# Altium PCB Copy of sFMC-98_s11.PcbDoc
Units mil, origin at the board's own origin, x right, y up, seen from the top; angles counter-clockwise.
Board outline 3131.92 x 2131.9 mil, 2 copper layers (Top Layer, Bottom Layer); 76 components, 110 nets, 418 pads, 16 vias.
Unrouted connection lines stored in the file: 247.
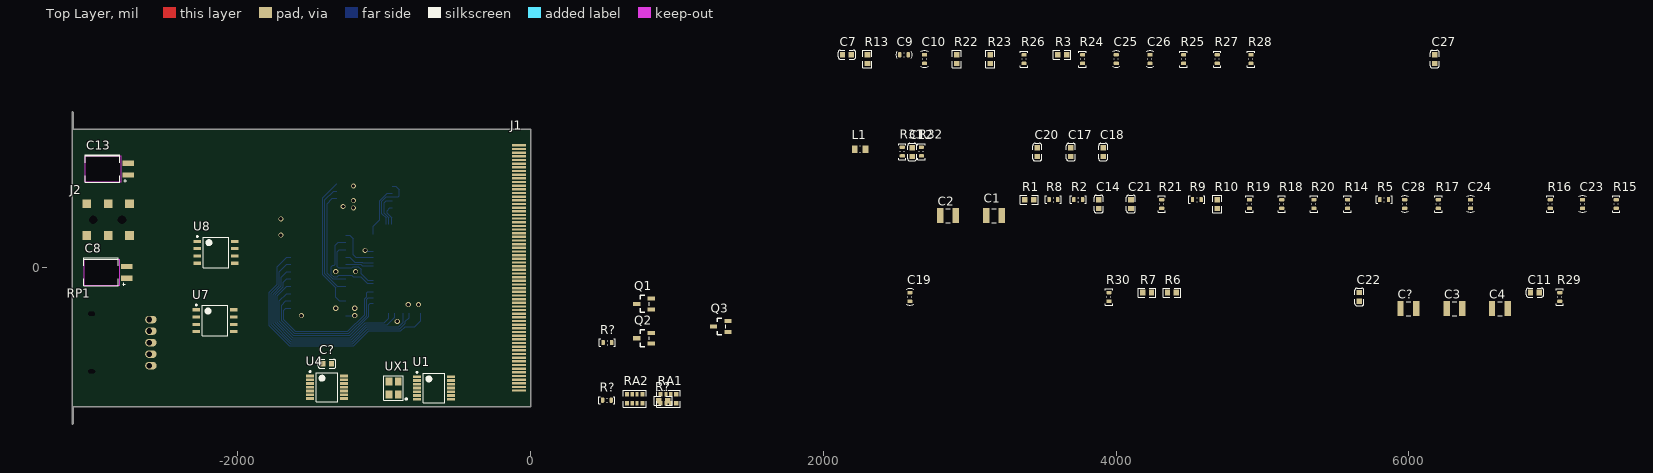
[diagram p0: Top Layer view]
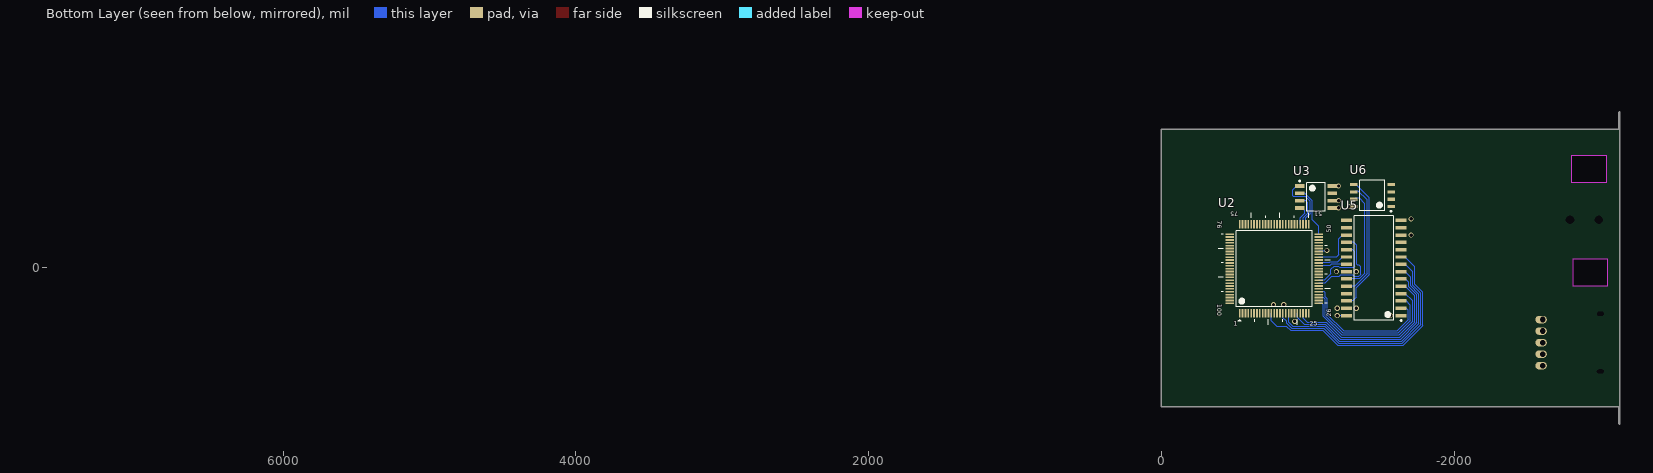
[diagram p1: Bottom Layer view, seen from below]

## Layer stack, top to bottom
Top Solder: solder mask 0.4, Solder Resist, Dk 3.5
Top Layer: signal copper 1.4
Dielectric 1: dielectric 12.6, FR-4, Dk 4.8
Bottom Layer: signal copper 1.4
Bottom Solder: solder mask 0.4, Solder Resist, Dk 3.5

## Board outline
-3131.2,-1062.99 -3131.2,1062.99 cw(c-3128.23,1062.99) -3125.26,1062.99 -3125.26,947.85 -2.24,947.85 cw(c-2.24,944.88) 0.72,944.88 0.72,-944.88 cw(c-2.24,-944.88) -2.24,-947.85 -3125.26,-947.85 -3125.26,-1062.99 cw(c-3128.23,-1062.99)
cut-out: -3040,765 -2800,765 -2800,585 -3040,585
cut-out: -3050,60 -2810,60 -2810,-120 -3050,-120

## Design rules (kind name [scope] priority, off if disabled: settings)
Clearance [All] p1: gap=6 ignorepadtopadclearanceinfootprint=FALSE except(0: Arc-Hole Track-Hole SMDPad-Hole THPad-Hole Via-Hole Fill-Hole Poly-Hole Region-Hole Text-Hole)
PolygonConnect [All] p1: connectstyle=Relief reliefconductorwidth=10 reliefentries=4 polygonreliefangle="90 Angle" airgapwidth=10
RoutingVias [All] p1: holewidth=28 width=50 viastyle="Through Hole" minholewidth=28 minwidth=50 maxholewidth=28 maxwidth=50
SolderMaskExpansion [All] p1: expansion=4
Width [All] p1: maxlimit=50 minlimit=4 preferedwidth=10 minimp=50.000000 maximp=50.000000 favimp=50.000000
30 further rules are at their usual default settings.

## Components (designator, comment, footprint, x,y, rotation, side; value= is the part's Value field where it differs from the comment)
C1 "Cap Pol3" C1210 3166.77,357.01 r0 top value=22uF
C2 "Cap Pol3" C1210 2851.77,357.01 r0 top value=22uF
C3 "Cap Pol3" C1210 6311.77,-277.99 r0 top value=22uF
C4 "Cap Pol3" C1210 6621.77,-277.99 r0 top value=22uF
C7 "100nF (104) 10% 50V" 0603_C 2161.77,1457.01 r0 top
C8 "Cap Elec" C-RB-4_5MM_Cutout -2827.13,-30 r180 top value=10uF
C9 "Cap" CEIA0603X04N 2551.77,1457.01 r0 top value=100nF
C10 "Cap" CEIA0603X04N 2691.77,1427.01 r90 top value=100nF
C11 "470nF (474) 10% 25V" 0603_C 6861.77,-167.99 r0 top
C12 "470nF (474) 10% 25V" 0603_C 2606.77,792.01 r90 top
C13 "Cap Elec" C-RB-4_5MM_Cutout -2817.13,675 r180 top value=10uF
C14 "100nF (104) 10% 50V" 0603_C 3881.77,437.01 r90 top
C17 "100nF (104) 10% 50V" 0603_C 3691.77,792.01 r90 top
C18 "100nF (104) 10% 50V" 0603_C 3911.77,792.01 r90 top
C19 "Cap" CEIA0603X04N 2591.77,-197.99 r90 top value=?F
C20 "100nF (104) 10% 50V" 0603_C 3461.77,792.01 r90 top
C21 "100nF (104) 10% 50V" 0603_C 4101.77,437.01 r90 top
C22 "100nF (104) 10% 50V" 0603_C 5661.77,-197.99 r90 top
C23 "Cap" CEIA0603X04N 7186.77,437.01 r90 top value=?F
C24 "Cap" CEIA0603X04N 6421.77,437.01 r90 top value=?F
C25 "Cap" CEIA0603X04N 4001.77,1427.01 r90 top value=100nF
C26 "Cap" CEIA0603X04N 4231.77,1427.01 r90 top value=100nF
C27 "100nF (104) 10% 50V" 0603_C 6176.77,1427.01 r90 top
C28 "Cap" CEIA0603X04N 5971.77,437.01 r90 top value=?F
C? "100nF (104) 10% 50V" 0603_C -1390,-655 r0 top
C? "Cap Pol3" C1210 5996.77,-277.99 r0 top value=22uF
J1 "PCMCIA Connector" PCF-SMT-K1 0,0 r270 top
J2 "PJ-242" PJ-242 -3097.36,330 r0 top
L1 "Bead" L2012X10N_LQW21 2251.77,812.01 r0 top value=1
Q1 "C945" SOT-23(SOT-23-3) 775,-245 r0 top
Q2 "C945" SOT-23(SOT-23-3) 775,-480 r0 top
Q3 "C945" SOT-23(SOT-23-3) 1300,-400 r0 top
R1 "10KΩ (1002) ±1%" 0603_R 3406.77,467.01 r0 top
R2 "Res1" REIA0603X04N 3741.77,467.01 r0 top value=472
R3 "10KΩ (1002) ±1%" 0603_R 3631.77,1457.01 r0 top
R5 "Res1" REIA0603X04N 5831.77,467.01 r0 top value=1K
R6 "10KΩ (1002) ±1%" 0603_R 4381.77,-167.99 r0 top
R7 "10KΩ (1002) ±1%" 0603_R 4211.77,-167.99 r0 top
R8 "Res1" REIA0603X04N 3571.77,467.01 r0 top value=473
R9 "Res1" REIA0603X04N 4551.77,467.01 r0 top value=472
R10 "10KΩ (1002) ±1%" 0603_R 4691.77,437.01 r90 top
R13 "10KΩ (1002) ±1%" 0603_R 2301.77,1427.01 r90 top
R14 "Res1" REIA0603X04N 5581.77,437.01 r90 top value=473
R15 "Res1" REIA0603X04N 7416.77,437.01 r90 top value=223
R16 "Res1" REIA0603X04N 6966.77,437.01 r90 top value=1K
R17 "Res1" REIA0603X04N 6201.77,437.01 r90 top value=1K
R18 "Res1" REIA0603X04N 5131.77,437.01 r90 top value=680
R19 "Res1" REIA0603X04N 4911.77,437.01 r90 top value=680
R20 "Res1" REIA0603X04N 5351.77,437.01 r90 top value=823
R21 "Res1" REIA0603X04N 4311.77,437.01 r90 top value=473
R22 "10KΩ (1002) ±1%" 0603_R 2911.77,1427.01 r90 top
R23 "10KΩ (1002) ±1%" 0603_R 3141.77,1427.01 r90 top
R24 "Res1" REIA0603X04N 3771.77,1427.01 r90 top value=223
R25 "Res1" REIA0603X04N 4461.77,1427.01 r90 top value=223
R26 "Res1" REIA0603X04N 3371.77,1427.01 r90 top value=473
R27 "Res1" REIA0603X04N 4691.77,1427.01 r90 top value=680
R28 "Res1" REIA0603X04N 4921.77,1427.01 r90 top value=680
R29 "Res1" REIA0603X04N 7031.77,-197.99 r90 top value=10K
R30 "Res1" REIA0603X04N 3951.77,-197.99 r90 top value=10K
R31 "Res1" REIA0603X04N 2540,795 r90 top value=10K
R32 "Res1" REIA0603X04N 2670,795 r270 top value=10K
R? "10KΩ (1002) ±1%" 0603_R 906.77,-907.99 r0 top
R? "Res1" REIA0603X04N 521.77,-902.99 r0 top value=1K
R? "Res1" REIA0603X04N 525,-510 r0 top value=Opt
RA1 "10KΩ (103) ±5%" 0603_Rx4 941.77,-892.99 r0 top
RA2 "10KΩ (103) ±5%" 0603_Rx4 711.77,-892.99 r0 top
RP1 "RPot Generic B103" RPot_RK10J12E_ALPS -2900,-510 r90 top
U1 "7474" TSSOP14_TSOP65P640X120-14N -660,-820 r0 top
U2 "Z86017/Z16017" VQFP100_TSQFP50P1600X1600X160-100N -770,-5 r90 bottom
U3 "ST93C56_C57" "SOIC-8 NB" -1055,485 r180 bottom
U4 "7404" TSSOP14_TSOP65P640X120-14N -1390,-815 r0 top
U5 "YMF288-M SOP28" SOP127P1030X265-28N -1450,0 r0 bottom
U6 "uPD6379A_AL" DMP8_SOIC127P680X175-8N -1440,495 r0 bottom
U7 "NJM3414AD/AM/AV" DMP8_SOIC127P680X175-8N -2155,-360 r0 top
U8 "NJM3414AD/AM/AV" DMP8_SOIC127P680X175-8N -2148.23,107.01 r0 top
UX1 "Crystal OSC" SMD-3225_4P -935,-820 r90 top

## Footprints (in the part's own frame and the unit in brackets; to place one, negate y for a bottom-side part, rotate by r counter-clockwise, add the part's x,y. Pads: shape width x height; smd on the part's side, far side on the other; paste and mask are expansions set on the pad)
0603_C [mm]
  rect 0.93x0.98 smd: 1(-0.77,0) 2(0.77,0)
  silkscreen extent -1.53,-0.79 1.54,0.79, body extent -0.8,-0.4 0.8,0.4, height 0.3
0603_R [mm]
  rect 0.93x0.98 smd: 1(-0.77,0) 2(0.77,0)
  silkscreen extent -1.53,-0.79 1.54,0.79, body extent -0.85,-0.4 0.85,0.4, height 0.56
0603_Rx4 [mm]
  rect 0.75x0.8 smd mask+0.051: 1(-1.35,-0.77) 4(1.35,-0.77) 5(1.35,0.77) 8(-1.35,0.77)
  rect 0.58x0.8 smd mask+0.051: 2(-0.4,-0.77) 3(0.4,-0.77) 6(0.4,0.77) 7(-0.4,0.77)
  silkscreen extent -2.02,-1.47 2.02,1.47, body extent -1.6,-0.8 1.6,0.8, height 0.55
C1210 [mm] "Chip Capacitor, Body 3.2x2.5mm, IPC High Density"
  rect 1.1x2.6 smd: 1(-1.35,0) 2(1.35,0)
  silkscreen extent -0.4,-1.2 0.4,1.2, body extent -1.7,-1.35 1.7,1.35, height 1.3
C-RB-4_5MM_Cutout [mil]
  rect 78.74x35.04 smd: 1(-70,40) 2(-70,-40)
  silkscreen extent -60,-100 225,90, body extent -79,-79 197,79, height 79
CEIA0603X04N [mm] "Chip Capacitor, 2-Leads, Body 1.55x0.85mm, Resistorguide Medium Density"
  rrect50% 0.6x0.9 smd: 1(-0.75,0) 2(0.75,0)
  silkscreen extent -1.4,-0.63 1.4,0.63, body extent -0.8,-0.45 0.8,0.45, height 0.45
DMP8_SOIC127P680X175-8N [mm] "SOIC, 8-Leads, Body 5.00x5.00mm, Pitch 1.27mm, IPC Medium Density"
  rect 1.3x0.55 smd: 1(-3.25,1.905) 2(-3.25,0.635) 3(-3.25,-0.635) 4(-3.25,-1.905) 5(3.25,-1.905) 6(3.25,-0.635) 7(3.25,0.635) 8(3.25,1.905)
  silkscreen extent -3.37,-2.65 2.2,2.85, body extent -3.4,-2.65 3.4,2.65, height 1.75
L2012X10N_LQW21 [mm] "Chip Inductor, 2-Leads, Body 2.00x1.20mm, IPC Medium Density, Murata LQW21 Series"
  rect 0.98x1.34 smd: 1(-0.94,0) 2(0.94,0)
  silkscreen extent -0.05,-0.57 0.05,0.57, body extent -1.05,-0.65 1.05,0.65, height 1
PCF-SMT-K1 [mm] "PCMCIA Female Single Side SMT"
  rect 0.4x2.5 smd: 1(-21.27,-2) 2(-20,-2) 3(-18.73,-2) 4(-17.46,-2) 5(-16.19,-2) 6(-14.92,-2) 7(-13.65,-2) 8(-12.38,-2) 9(-11.11,-2) 10(-9.84,-2) 11(-8.57,-2) 12(-7.3,-2) 13(-6.03,-2) 14(-4.76,-2) 15(-3.49,-2) 16(-2.22,-2) 17(-0.95,-2) 18(0.32,-2) 19(1.59,-2) 20(2.86,-2) 21(4.13,-2) 22(5.4,-2) 23(6.67,-2) 24(7.94,-2) 25(9.21,-2) 26(10.48,-2) 27(11.75,-2) 28(13.02,-2) 29(14.29,-2) 30(15.56,-2) 31(16.83,-2) 32(18.1,-2) 33(19.37,-2) 34(20.64,-2) 35(-20.635,-2) 36(-19.365,-2) 37(-18.095,-2) 38(-16.825,-2) 39(-15.555,-2) 40(-14.285,-2) 41(-13.015,-2) 42(-11.745,-2) 43(-10.475,-2) 44(-9.205,-2) 45(-7.935,-2) 46(-6.665,-2) 47(-5.395,-2) 48(-4.125,-2) 49(-2.855,-2) 50(-1.585,-2) 51(-0.315,-2) 52(0.955,-2) 53(2.225,-2) 54(3.495,-2) 55(4.765,-2) 56(6.035,-2) 57(7.305,-2) 58(8.575,-2) 59(9.845,-2) 60(11.115,-2) 61(12.385,-2) 62(13.655,-2) 63(14.925,-2) 64(16.195,-2) 65(17.465,-2) 66(18.735,-2) 67(20.005,-2) 68(21.27,-2)
  body extent -23.2,0 23.2,6, height 1.75
PJ-242 [mm]
  round 0 hole 1.5: 0(2.8,0) 0(7.8,0)
  rect 1.5x1.5 smd: 2(1.7,2.75) 3(5.4,2.75) 4(9.1,2.75) 5(1.7,-2.75) 6(5.4,-2.75) 7(9.1,-2.75)
  body extent -1.5,-2.5 10.5,2.5, height 3.6
REIA0603X04N [mm] "Chip Resistor, 2-Leads, Body 1.55x0.85mm, Resistorguide Medium Density"
  rrect50% 0.6x0.9 smd: 1(-0.75,0) 2(0.75,0)
  silkscreen extent -1.4,-0.64 1.4,0.64, body extent -0.8,-0.45 0.8,0.45, height 0.45
RPot_RK10J12E_ALPS [mm] "Thru Hole Rotary Potentiometer"
  round 0 hole 0.7 slot 1.2 at 90 deg: 0(-5,2.5) 0(5,2.5)
  oval 1.3x2 hole 1 copper offset 0,-0.3: 1(-4,-7.5) 2(-2,-7.5) 3(0,-7.5) 4(2,-7.5) 5(4,-7.5)
SMD-3225_4P [mm]
  rect 1.4x1.15 smd: 1(-1.1,-0.8) 2(1.1,-0.8) 3(1.1,0.8) 4(-1.1,0.8)
  silkscreen extent -2.1,-2.35 2.1,1.7, body extent -1.6,-1.25 1.6,1.25, height 0.61
"SOIC-8 NB" [mm] "SOIC, 8-Leads, Body 4.90x3.90mm, Pitch 1.27mm, IPC Low Density"
  rect 1.65x0.65 smd: 1(-2.825,1.905) 2(-2.825,0.635) 3(-2.825,-0.635) 4(-2.825,-1.905) 5(2.825,-1.905) 6(2.825,-0.635) 7(2.825,0.635) 8(2.825,1.905)
  silkscreen extent -2.95,-2.5 1.6,2.9, body extent -3,-2.5 3,2.5, height 1.75
SOP127P1030X265-28N [mm] "SOP, 28-Leads, Body 17.90x7.50mm, Pitch 1.27mm, IPC Medium Density"
  rect 1.9x0.6 smd: 1(-4.75,8.255) 2(-4.75,6.985) 3(-4.75,5.715) 4(-4.75,4.445) 5(-4.75,3.175) 6(-4.75,1.905) 7(-4.75,0.635) 8(-4.75,-0.635) 9(-4.75,-1.905) 10(-4.75,-3.175) 11(-4.75,-4.445) 12(-4.75,-5.715) 13(-4.75,-6.985) 14(-4.75,-8.255) 15(4.75,-8.255) 16(4.75,-6.985) 17(4.75,-5.715) 18(4.75,-4.445) 19(4.75,-3.175) 20(4.75,-1.905) 21(4.75,-0.635) 22(4.75,0.635) 23(4.75,1.905) 24(4.75,3.175) 25(4.75,4.445) 26(4.75,5.715) 27(4.75,6.985) 28(4.75,8.255)
  silkscreen extent -4.87,-9.05 3.4,9.23, body extent -5.16,-9.05 5.16,9.05, height 2.65
SOT-23(SOT-23-3) [mm]
  rect 1.25x0.7 smd: 1(1.25,-0.95) 2(1.25,0.95) 3(-1.25,0)
  silkscreen extent -0.65,-1.46 0.9,1.46, body extent -1.5,-1.5 1.5,1.5, height 1.3
TSSOP14_TSOP65P640X120-14N [mm] "TSOP, 14-Leads, Body 5.00x4.40mm, Pitch 0.65mm, IPC Medium Density"
  rect 1.4x0.45 smd: 1(-2.95,1.95) 2(-2.95,1.3) 3(-2.95,0.65) 4(-2.95,0) 5(-2.95,-0.65) 6(-2.95,-1.3) 7(-2.95,-1.95) 8(2.95,-1.95) 9(2.95,-1.3) 10(2.95,-0.65) 11(2.95,0) 12(2.95,0.65) 13(2.95,1.3) 14(2.95,1.95)
  silkscreen extent -3.07,-2.55 1.85,2.85, body extent -3.2,-2.55 3.2,2.55, height 1.2
VQFP100_TSQFP50P1600X1600X160-100N [mm] "TSQFP, 100-Leads, Body 14.00x14.00mm, Pitch 0.50mm, IPC Medium Density"
  rect 1.45x0.3 smd: 1(-7.725,6) 2(-7.725,5.5) 3(-7.725,5) 4(-7.725,4.5) 5(-7.725,4) 6(-7.725,3.5) 7(-7.725,3) 8(-7.725,2.5) 9(-7.725,2) 10(-7.725,1.5) 11(-7.725,1) 12(-7.725,0.5) 13(-7.725,0) 14(-7.725,-0.5) 15(-7.725,-1) 16(-7.725,-1.5) 17(-7.725,-2) 18(-7.725,-2.5) 19(-7.725,-3) 20(-7.725,-3.5) 21(-7.725,-4) 22(-7.725,-4.5) 23(-7.725,-5) 24(-7.725,-5.5) 25(-7.725,-6) 51(7.725,-6) 52(7.725,-5.5) 53(7.725,-5) 54(7.725,-4.5) 55(7.725,-4) 56(7.725,-3.5) 57(7.725,-3) 58(7.725,-2.5) 59(7.725,-2) 60(7.725,-1.5) 61(7.725,-1) 62(7.725,-0.5) 63(7.725,0) 64(7.725,0.5) 65(7.725,1) 66(7.725,1.5) 67(7.725,2) 68(7.725,2.5) 69(7.725,3) 70(7.725,3.5) 71(7.725,4) 72(7.725,4.5) 73(7.725,5) 74(7.725,5.5) 75(7.725,6)
  rect 0.3x1.45 smd: 26(-6,-7.725) 27(-5.5,-7.725) 28(-5,-7.725) 29(-4.5,-7.725) 30(-4,-7.725) 31(-3.5,-7.725) 32(-3,-7.725) 33(-2.5,-7.725) 34(-2,-7.725) 35(-1.5,-7.725) 36(-1,-7.725) 37(-0.5,-7.725) 38(0,-7.725) 39(0.5,-7.725) 40(1,-7.725) 41(1.5,-7.725) 42(2,-7.725) 43(2.5,-7.725) 44(3,-7.725) 45(3.5,-7.725) 46(4,-7.725) 47(4.5,-7.725) 48(5,-7.725) 49(5.5,-7.725) 50(6,-7.725) 76(6,7.725) 77(5.5,7.725) 78(5,7.725) 79(4.5,7.725) 80(4,7.725) 81(3.5,7.725) 82(3,7.725) 83(2.5,7.725) 84(2,7.725) 85(1.5,7.725) 86(1,7.725) 87(0.5,7.725) 88(0,7.725) 89(-0.5,7.725) 90(-1,7.725) 91(-1.5,7.725) 92(-2,7.725) 93(-2.5,7.725) 94(-3,7.725) 95(-3.5,7.725) 96(-4,7.725) 97(-4.5,7.725) 98(-5,7.725) 99(-5.5,7.725) 100(-6,7.725)
  silkscreen extent -9.7,-9.7 9.7,9.7, body extent -8,-8 8,8, height 1.6

## Part data
C1 C2 C3 C4 C?: "Polarized Capacitor (Surface Mount)", LatestRevisionDate=29-May-2009, LatestRevisionNote="IPC-7351 Footprint Added.", PackageDescription="Chip Capacitor", PackageReference=C0805, Published=8-Jun-2000, Publisher="Altium Limited"
C7 C14 C17 C18 C20 C21 C22 C27 C?: library part "0603 100nF (104) 10% 50V", "贴片电容", Package=0603, SuppliersPartNumber=C14663, ComponentLink1Description=供应商, ComponentLink1URL=http://www.szlcsc.com/product/details_15331.html, Supplier=LC
C8 C13: library part "Cap Pol3", "Polarized Capacitor (Surface Mount)", LatestRevisionDate=29-May-2009, LatestRevisionNote="IPC-7351 Footprint Added.", PackageDescription="Chip Capacitor", PackageReference=C0805, Published=8-Jun-2000, Publisher="Altium Limited"
C9 C10 C19 C23 C24 C25 C26 C28: "Capacitor", LatestRevisionDate=17-Jul-2002, LatestRevisionNote="Re-released for DXP Platform.", PackageDescription="Radial Cap, Thru-Hole; 2 Leads; 0.3 in Pin Spacing", PackageReference=RAD-0.3, Published=8-Jun-2000, Publisher="Altium Limited"
C11 C12: library part "0603 470nF (474) 10% 25V", "贴片电容", Package=0603, SuppliersPartNumber=C1623, ComponentLink1Description=供应商, ComponentLink1URL=http://www.szlcsc.com/product/details_1975.html, Supplier=LC
J1: library part PCMCIA_Conn
J2: "2.5mm Headphone Jack"
L1: library part Inductor, "Inductor", Code_IEC=1005, Code_JEITA=0402, LatestRevisionDate=29-May-2009, LatestRevisionNote="IPC-7351 Footprint Added.", PackageDescription="Chip Inductor", PackageReference=0402-A, Published=8-Jun-2000, Publisher="Altium Limited"
Q1 Q2 Q3: library part "SOT-23 SS8050 Y1", "三极管", Package=SOT-23, SuppliersPartNumber=C2150, ComponentLink1Description=供应商链接, ComponentLink1URL=http://www.szlcsc.com/product/details_2507.html, Supplier=LC
R1 R3 R6 R7 R10 R13 R22 R23 R?: library part "0603 10KΩ (1002) 1%", "贴片电阻", Package=0603, SuppliersPartNumber=C25804, ComponentLink1Description=供应商链接, ComponentLink1URL=http://www.szlcsc.com/product/details_26547.html, Supplier=LC
R2 R5 R8 R9 R14 R15 R16 R17 R18 R19 R20 R21 R24 R25 R26 R27 R28 R29 R30 R31 R32 R? R?: "Resistor", LatestRevisionDate=17-Jul-2002, LatestRevisionNote="Re-released for DXP Platform.", PackageDescription="Axial Device, Thru-Hole; 2 Leads; 0.3 in Pin Spacing", PackageReference=AXIAL-0.3, Published=8-Jun-2000, Publisher="Altium Limited"
RA1 RA2: library part "0603*4  10KΩ (103) 5%", "贴片排阻", Package=0603*4, SuppliersPartNumber=C29718, ComponentLink1Description=供应商, ComponentLink1URL=http://www.szlcsc.com/product/details_30472.html, Supplier=LC
RP1: library part RPot_Generic_Bxxx
U1: library part 7474_J_N_1, "Dual D-Type Positive-Edge-Triggered Flip-Flops With Preset And Clear"
U2: library part ZX6017
U3: "2K (128 x 16 or 256 x 8) SERIAL MICROWIRE EEPROM"
U4: library part 7404_J_N_1, "Hex Inverter"
U5: library part YMF288_M
U6: "2-CHANNEL 16-BIT D/A CONVERTER FOR AUDIO APPLICATION"
U7 U8: library part NJM3414AD_AM_AV_1, "Single-Supply Dual High Current Operational Amplifier"
UX1: library part XTAL_OSC, Freq=7.98MHz

## Via types
v1: diameter 35.43, hole 23.62, Top Layer to Bottom Layer, 16 vias

## Nets (pads, with @x,y where several pads share a name; then routed paths per layer and width w, separated by ;. In a path a pad name is that pad's centre, name@x,y a point inside that pad or via, vN(x,y) a via of type N, cw(c..) or ccw(c..) an arc to the next point about the centre after c; other vN are vias at no path point)
5V: C1.1 C14.2 C17.2 C18.2 C20.2 C21.2 C22.1 C?.2@-1359.69,-655 J1.17 J1.51 L1.2 R6.2 R7.2 R8.2 R13.2 R29.2 R32.2 R?.2@937.09,-907.99 RA1.5 RA1.6 RA1.7 RA1.8 RA2.5 RA2.6 RA2.7 RA2.8 U1.1 U1.4 U1.10 U1.12 U1.14 U2.14 U2.24 U2.38 U2.62 U2.73 U2.82 U2.93 U3.8 U4.14 U5.12 U5.22 U5.27 UX1.4
  other v1: -1330,-275 -1200,-275 -765,-250 -1330,-25 -1195,-25 -1705,225 -1210,560
A5V: C3.1 C4.1 C7.1 C27.1 L1.1 R15.1 U6.8 U7.8 U8.8
  other v1: -1280,420
ATA_A0: U2.40 U5.20 | length 205.7
  Bottom Layer w8: U5.20 -1235,75 -1199.37,39.37 -1149.37,39.37 -1144.37,34.37 U2.40
ATA_A1: U2.39 U5.21 | length 193.1
  Bottom Layer w8: U5.21 -1160,25 -1149.68,14.68 U2.39
ATA_C\S\: U2.42 U5.17 | length 315.9
  Bottom Layer w8: U5.17 -1235,225 -1210,200 -1210,90 -1193.74,73.74 U2.42
ATA_D0: RA2.4 U2.30 U5.2 | length 956.9
  Bottom Layer w8: U5.2 -1672,-275 -1687,-290 -1687,-353.6 -1607.6,-433 -1247.6,-433 -1134,-319.4 -1134,-209.2 -1120,-195.2 -1120,-170 -1112.48,-162.48 U2.30
ATA_D1: RA2.3 U2.28 U5.3 | length 1010.1
  Bottom Layer w8: U5.3 -1671,-225 -1701,-255 -1701,-359.4 -1613.4,-447 -1241.8,-447 -1120,-325.2 -1120,-215 -1106.85,-201.85 U2.28
ATA_D2: RA2.2 U2.26 U5.4 | length 1057.3
  Bottom Layer w8: U5.4 -1665,-175 -1715,-225 -1715,-365.2 -1619.2,-461 -1236,-461 -1105,-330 -1105,-250 -1096.22,-241.22 U2.26
ATA_D3: RA2.1 U2.23 U5.5 | length 1194.4
  Bottom Layer w8: U5.5 -1665,-125 -1730,-190 -1730,-370 -1625,-475 -1230.2,-475 -1129.2,-374 -999,-374 -966.85,-341.85 U2.23
ATA_D4: RA1.4 U2.21 U5.6 | length 1316.4
  Bottom Layer w8: U5.6 -1665,-75 -1688,-98 -1688,-128.2 -1744,-184.2 -1744,-375.8 -1630.8,-489 -1224.4,-489 -1123.4,-388 -977.44,-388 -927.48,-338.04 U2.21
ATA_D5: RA1.3 U2.18 U5.7 | length 1480
  Bottom Layer w8: U5.7 -1665,-25 -1702,-62 -1702,-122.4 -1758,-178.4 -1758,-381.6 -1636.6,-503 -1218.6,-503 -1117.6,-402 -898.52,-402 -868.43,-371.91 U2.18
ATA_D6: RA1.2 U2.16 U5.8 | length 1592.7
  Bottom Layer w8: U5.8 -1665,25 -1716,-26 -1716,-116.6 -1772,-172.6 -1772,-387.4 -1642.4,-517 -1212.8,-517 -1111.8,-416 -892.72,-416 -854.43,-377.7 -854.43,-364.43 -829.06,-339.06 U2.16
ATA_D7: RA1.1 U2.12 U5.9 | length 1761
  Bottom Layer w8: U5.9 -1665,75 -1730,10 -1730,-110.8 -1786,-166.8 -1786,-393.2 -1648.2,-531 -1207.01,-531 -1106.01,-430 -885,-430 -855,-400 -790,-400 -750.31,-360.31 U2.12
ATA_IRQ: U2.36 U4.8
ATA_R\D\: U2.34 U5.19 | length 473.8
  Bottom Layer w8: U5.19 -1305,125 -1320,110 -1320,10 -1310,0 -1220,0 -1210,10 -1175,10 -1155,-10 -1155,-40 -1111.26,-83.74 U2.34
ATA_W\R\: U2.33 U5.18 | length 614.9
  Bottom Layer w8: U5.18 -1315,175 -1334,156 -1334,26 -1340,20 -1350,20 -1360,10 -1360,-45 -1345,-60 -1320,-60 -1310,-50 -1220,-50 -1210,-60 -1160,-60 -1116.57,-103.43 U2.33
GND: C1.2 C2.2 C3.2 C4.2 C7.2 C9.1 C10.2 C14.1 C17.1 C18.1 C19.1 C20.1 C21.1 C22.2 C27.2 C28.1 C?.1@-1420.31,-655 C?.2@6049.92,-277.99 J1.1 J1.34 J1.35 J1.36 J1.57 J1.67 J1.68 J2.5 J2.6 Q1.2 Q2.2 Q3.2 R2.1 R14.2 R21.1 R26.1 R30.1 R31.1 R?.1@495.47,-510 RP1.1 U1.7 U2.5 U2.15 U2.20 U2.32 U2.44 U2.68 U2.77 U2.88 U3.5 U3.6 U4.3 U4.7 U5.1 U5.14 U5.16 U6.3 U7.4 U8.4 UX1.2 | length 58.7
  Bottom Layer w8: v1(-1130,120) -1123.11,113.11 U2.44
  other v1: -910,-365 -1565,-325 -835,-250 -1705,335 -1210,410 -1210,460
NetC2_1: C2.1 R1.1 R8.1
NetC8_1: C8.1 C25.1 R24.2 U8.1
NetC8_2: C8.2 R18.2 R19.2
NetC9_2: C9.2 R22.1
NetC10_1: C10.1 R23.1
NetC11_1: C11.1 RP1.3
NetC11_2: C11.2 R29.1 R30.2 U8.3
NetC12_1: C12.1 RP1.2
NetC12_2: C12.2 R31.2 R32.1 U8.5
NetC13_1: C13.1 C26.1 R25.2 U8.7
NetC13_2: C13.2 R27.2 R28.2
NetC19_2: C19.2 U2.56
NetC23_1: C23.1 J2.4
NetC23_2: C23.2 R16.2
NetC24_1: C24.1 J2.7
NetC24_2: C24.2 R17.2
NetC25_2: C25.2 R22.2 R24.1 U8.2
NetC26_2: C26.2 R23.2 R25.1 U8.6
NetC28_2: C28.2 R5.2
NetC?_1: C?.1@5943.62,-277.99 U6.2
NetJ1_33: J1.33 U2.10
NetJ2_2: J2.2 Q1.3 R18.1 R19.1 R21.2
NetJ2_3: J2.3 Q2.3 R26.2 R27.1 R28.1
NetN?_1: Q3.3
NetQ1_1: Q1.1 R10.1
NetQ2_1: Q2.1 R3.1
NetQ3_1: Q3.1 R?.1@492.24,-902.99
NetR1_2: R1.2 U4.5
NetR2_2: R2.2 R3.2 R9.2 R10.2
NetR5_1: R5.1 R20.1 U7.6
NetR7_1: R7.1 U2.51
NetR9_1: R9.1 U4.6
NetR14_1: R14.1 R15.2 R16.1 R17.1 U7.5
NetR20_2: R20.2 U7.3 U7.7
NetR?_1: R?.1@876.46,-907.99 U2.60
NetR?_2: R?.2@554.53,-510 UX1.1
NetRP1_4: RP1.4 U6.4
NetRP1_5: RP1.5 U6.1
NetU1_2: U1.2 U1.6
NetU1_5: U1.5 U2.58
NetU1_9: U1.9 U5.11
NetU1_11: U1.11 U4.2
NetU1_13: U1.13 U2.11
NetU2_50: U2.50 U3.2 | length 353.9
  Bottom Layer w8: U2.50 -1074.13,285.87 -1029,331 -1029,460.8 -979.8,510 U3.2
NetU2_52: U2.52 U3.1 | length 403.4
  Bottom Layer w8: U2.52 -986.54,341.54 -1015,370 -1015,455 -985,485 -905,485 -895,495 -895,535 -920,560 U3.1
NetU2_53: U2.53 U3.3 | length 222
  Bottom Layer w8: U2.53 -966.85,341.65 -1000,374.8 -1000,445 -985,460 U3.3
NetU2_54: U2.54 U3.4 | length 149
  Bottom Layer w8: U2.54 -947.17,341.76 -980,374.6 -980,390 -960,410 U3.4
PC_A0: J1.29 U2.1
PC_A1: J1.28 U2.99
PC_A2: J1.27 U2.97
PC_A3: J1.26 U2.95
PC_A4: J1.25 U2.91
PC_A5: J1.24 U2.90
PC_A6: J1.23 U2.89
PC_A7: J1.22 U2.87
PC_A8: J1.12 U2.84
PC_A9: J1.11 U2.83
PC_A10: J1.8 U2.76
PC_C\E\1\: J1.7 U2.74
PC_C\E\2\: J1.42 U2.78
PC_D0: J1.30 U2.3
PC_D1: J1.31 U2.6
PC_D2: J1.32 U2.8
PC_D3: J1.2 U2.63
PC_D4: J1.3 U2.64
PC_D5: J1.4 U2.66
PC_D6: J1.5 U2.69
PC_D7: J1.6 U2.71
PC_D8: J1.64 U2.4
PC_D9: J1.65 U2.7
PC_D10: J1.66 U2.9
PC_D11: J1.37 U2.65
PC_D12: J1.38 U2.67
PC_D13: J1.39 U2.70
PC_D14: J1.40 U2.72
PC_D15: J1.41 U2.75
PC_H\W\E\: J1.15 U2.85
PC_I\N\P\A\C\K\: J1.60 U2.96
PC_I\O\R\D\: J1.44 U2.80
PC_I\O\W\R\: J1.45 U2.81
PC_I\R\E\Q\: J1.16 U2.86
PC_O\E\: J1.9 R6.1 U2.79
PC_R\E\G\: J1.61 U2.98
PC_RESET: J1.58 U2.92
PC_STSCHG: J1.63 U2.2
PC_W\A\I\T\: J1.59 U2.94
SPK_ENABLE: R?.2@551.3,-902.99 U2.100
YM_BCO: U5.23 U6.7 | length 700.9
  Bottom Layer w8: U6.7@-1322.05,475 -1355,475 -1390,440 -1390,-34.8 -1349.8,-75 U5.23
YM_I\R\Q\: R13.1 U4.9 U5.15
YM_LRO: U5.26 U6.5 | length 928.9
  Bottom Layer w8: U6.5@-1322.05,575 -1322.61,575 -1418,479.61 -1418,-46.4 -1330,-134.4 -1330,-200 -1305,-225 U5.26
YM_MCLK: U1.3 U5.28 UX1.3 | length 63
  Bottom Layer w8: U5.28 v1(-1200,-325)
YM_SO: U5.24 U6.6 | length 789
  Bottom Layer w8: U6.6@-1322.05,525 -1345,525 -1404,466 -1404,-40.6 -1319.6,-125 U5.24
YM_WCO: U4.1 U4.11 U4.13 U5.25
pads on no net: J1.10 J1.13 J1.14 J1.18 J1.19 J1.20 J1.21 J1.43 J1.46 J1.47 J1.48 J1.49 J1.50 J1.52 J1.53 J1.54 J1.55 J1.56 J1.62 J2.0 RP1.0 U1.8 U2.13 U2.17 U2.19 U2.22 U2.25 U2.27 U2.29 U2.31 U2.35 U2.37 U2.41 U2.43 U2.45 U2.46 U2.47 U2.48 U2.49 U2.55 U2.57 U2.59 U2.61 U3.7 U4.4 U4.10 U4.12 U5.10 U5.13 U7.1 U7.2

## Silkscreen, mask and mechanical layers (free items; w line width, h text height)
Mechanical 13:
  lines w5.91: -3128.23,0 241.85,0 ; -3128.23,945 -3128.11,944.88 -151.85,944.88 ; -3128.11,-944.88 -151.85,-944.88 ; -2.13,945 -2.24,944.88 ; 233.98,-1062.99 -3128.23,1062.99 ; 233.98,1062.99 -3128.23,-1062.99 ; -3128.23,-1062.99 -3128.23,1062.99 ; -3128.23,-1062.99 241.85,-1062.99 241.85,1062.99 -3128.23,1062.99 ; -151.85,-944.88 -2.24,-944.88 -2.24,944.88 ; -151.85,-944.88 -151.85,944.88 ; -151.85,944.88 -2.24,944.88

## Text inside footprints (layer, text, board x,y; h text height)
RP1: Mechanical 1 "ALPS RK10J12E" at -2750.39,-714.72 h30 r90
U2: Bottom Overlay "1" at -494.41,-395.75 h30; Bottom Overlay "25" at -1014.09,-395.75 h30; Bottom Overlay "26" at -1159.76,-332.76 h30 r270; Bottom Overlay "51" at -1097.76,384.76 h30 r180; Bottom Overlay "76" at -380.24,322.76 h30 r90; Bottom Overlay "50" at -1160.75,239.09 h30 r270; Bottom Overlay "75" at -525.91,385.75 h30 r180; Bottom Overlay "100" at -379.25,-249.09 h30 r90